# EAGLE board board (EAGLE 9.7.0)
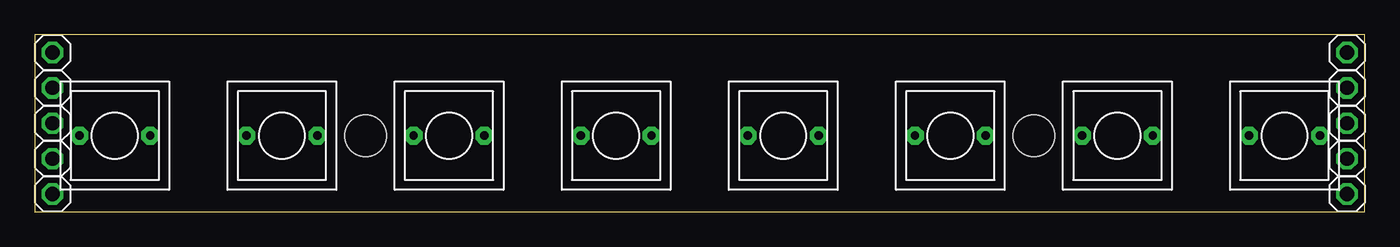
[diagram p0: board, top side]
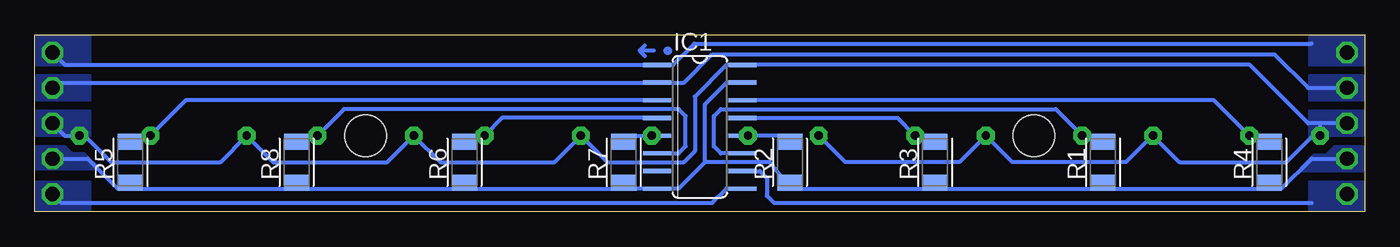
[diagram p1: board, bottom side, seen from below]

Size 95.5 x 12.7 mm. Coordinates in mm from the lower left corner, seen from the top.
Outline: 0,0 95.5,0 95.5,12.7 0,12.7 0,0
Copper layers (1*16): Top 0.035mm / dielectric 1.5mm / Bottom 0.035mm
Design rules "default *": minimum track width 6mil, minimum drill 0.35mm, track to track 13mil, track to pad 13mil, pad to pad 13mil, via to via 13mil, smd to smd 0mil, copper to edge 0mil, drill to drill 0mil, minimum pad ring 10mil, minimum via ring 8mil, stop-mask expansion 4mil, vias tented up to drill 0mil, thermal gap 10mil
Holes 3 mm at 23.75,5.46 71.75,5.46

## Footprints (pad centres in the part's own frame; a part is rotated, then mirrored left to right if it is on the bottom)
SO16 = smd 0.305 x 2.032: 1 -4.445,-3.073; 2 -3.175,-3.073; 3 -1.905,-3.073; 4 -0.635,-3.073; 5 0.635,-3.073; 6 1.905,-3.073; 7 3.175,-3.073; 8 4.445,-3.073; 9 4.445,3.073; 10 3.175,3.073; 11 1.905,3.073; 12 0.635,3.073; 13 -0.635,3.073; 14 -1.905,3.073; 15 -3.175,3.073; 16 -4.445,3.073
1X01 = drill 1.016 octagon: 1 0,0
RESC3216X70 = smd 1.165 x 1.815: 1 -1.475,0; 2 1.475,0
BUTTON = drill 0.6 pad 1.27 octagon: P$1 2.54,0; P$2 -2.54,0

## Placement (x,y rotation side)
IC1  74HC165D  [SO16]  47.75,6.1 270 bottom
JP2  PINHD-1X1  [1X01]  94.23,3.81 0 top
JP3  PINHD-1X1  [1X01]  1.27,11.43 0 top
JP4  PINHD-1X1  [1X01]  1.27,8.89 0 top
JP5  PINHD-1X1  [1X01]  1.27,1.27 0 top
JP6  PINHD-1X1  [1X01]  1.27,6.35 0 top
JP7  PINHD-1X1  [1X01]  1.27,3.81 0 top
JP8  PINHD-1X1  [1X01]  94.23,6.35 0 top
JP9  PINHD-1X1  [1X01]  94.23,1.27 0 top
JP10  PINHD-1X1  [1X01]  94.23,8.89 0 top
JP11  PINHD-1X1  [1X01]  94.23,11.43 0 top
R1  [RESC3216X70]  18.8,3.56 90 bottom
R2  [RESC3216X70]  41.28,3.56 90 bottom
R3  [RESC3216X70]  30.86,3.56 90 bottom
R4  [RESC3216X70]  6.86,3.56 90 bottom
R5  [RESC3216X70]  88.65,3.56 90 bottom
R6  [RESC3216X70]  64.64,3.56 90 bottom
R7  [RESC3216X70]  53.21,3.56 90 bottom
R8  [RESC3216X70]  76.71,3.56 90 bottom
S1  BUTTON  [BUTTON]  17.75,5.46 180 top
S2  BUTTON  [BUTTON]  41.75,5.46 180 top
S3  BUTTON  [BUTTON]  29.75,5.46 180 top
S4  BUTTON  [BUTTON]  5.75,5.46 180 top
S5  BUTTON  [BUTTON]  89.75,5.46 0 top
S6  BUTTON  [BUTTON]  65.75,5.46 0 top
S7  BUTTON  [BUTTON]  53.75,5.46 0 top
S8  BUTTON  [BUTTON]  77.75,5.46 0 top

## Library data of the parts
IC1 S1-S8 = Pravdomil Electronic Library
JP2-JP11 = Pravdomil Electronic Library; CATEGORY: CONNECTOR; SUB-CATEGORY: PIN-HEADER
R1-R8 = Resistor; CATEGORY: Resistor; SUB-CATEGORY: Fixed

## Nets
CLK: IC1.2 JP4.1 JP10.1
GND: IC1.8 IC1.15 JP2.1 JP7.1 R1.1 R2.1 R3.1 R4.1 R5.1 R6.1 R7.1 R8.1
INPUT_1: IC1.11 R1.2 S1.P$2
INPUT_2: IC1.12 R2.2 S2.P$2
INPUT_3: IC1.13 R3.2 S3.P$2
INPUT_4: IC1.14 R4.2 S4.P$2
INPUT_5: IC1.3 R5.2 S5.P$2
INPUT_6: IC1.4 R6.2 S6.P$2
INPUT_7: IC1.5 R7.2 S7.P$2
INPUT_8: IC1.6 R8.2 S8.P$2
LATCH: IC1.1 JP3.1 JP11.1
SER_IN: IC1.10 JP5.1
SER_OUT: IC1.9 JP9.1
VCC: IC1.16 JP6.1 JP8.1 S1.P$1 S2.P$1 S3.P$1 S4.P$1 S5.P$1 S6.P$1 S7.P$1 S8.P$1

## Tracks (layer width: path | path; a pad name or v marks a point on that pad's centre or on a via)
CLK
  Bottom 0.305: JP10.1 93.85,9.27 IC1.2 48.9,9.27 46.86,11.3 6.48,11.3 4.06,8.89 JP4.1
  pour Bottom (no thermals): 0.15,8.03 3.91,8.03 3.91,9.75 0.15,9.75
  pour Bottom (no thermals): 91.59,8.03 95.35,8.03 95.35,9.75 91.59,9.75
GND
  Bottom 0.305: JP7.1 3.82,3.81 6,1.65 6.35,1.65 R4.1 7.49,1.65 18.31,1.65 R1.1 19.3,1.65 30.35,1.65 R3.1 31.39,1.65 40.51,1.65 R2.1 41.57,2.13 42.73,3.56 47.37,3.56 | JP2.1 91.69,3.81 89.53,1.65 89.03,1.65 R5.1 88.27,1.65 77.09,1.65 R8.1 76.33,1.65 65.02,1.65 R6.1 64.13,1.65 53.98,1.65 R7.1 53.09,2.13 52.6,1.65 IC1.8 49.28,1.65 47.37,3.56 | 47.37,3.56 47.37,7.72 45.82,9.27 IC1.15
  pour Bottom (no thermals): 4.55,3.11 3.62,4.04 2.76,4.04 2.71,4.06 2.1,4.67 0.15,4.67 0.15,2.95 4.55,2.95
  pour Bottom (no thermals): 93.41,4.67 92.92,4.19 92.87,4.17 92.01,4.17 90.92,3.07 95.35,3.07 95.35,4.67
INPUT_1
  Bottom 0.305: IC1.11 46.23,4.19 46.74,4.7 46.74,6.86 46.23,7.37 22.19,7.37 S1.P$2 20.09,5.66 R1.2
INPUT_2
  Bottom 0.152: IC1.12 44.3,5.46
  Bottom 0.305: 44.3,5.46 S2.P$2 41.5,5.46 R2.2
INPUT_3
  Bottom 0.305: R3.2 31.01,5.46 S3.P$2 33.56,6.73 IC1.13
INPUT_4
  Bottom 0.305: IC1.14 10.83,8 S4.P$2 7.01,5.46 R4.2
INPUT_5
  Bottom 0.305: IC1.3 84.67,8 S5.P$2 87.36,5.61 R5.2
INPUT_6
  Bottom 0.305: IC1.4 61.94,6.73 S6.P$2 64.49,5.46 R6.2
INPUT_7
  Bottom 0.152: IC1.5 S7.P$2
  Bottom 0.305: R7.2 52.98,5.46 S7.P$2
INPUT_8
  Bottom 0.305: IC1.6 49.28,4.19 48.77,4.7 48.77,6.86 49.28,7.37 73.3,7.37 S8.P$2 75.4,5.66 R8.2
LATCH
  Bottom 0.305: 3.81,12.06 48.13,12.06 49.66,10.54 IC1.1 93.34,10.54 JP11.1
  pour Bottom (no thermals): 0.08,10.49 3.99,10.49 3.99,12.62 0.08,12.62
  pour Bottom (no thermals): 91.59,10.57 95.35,10.57 95.35,12.55 91.59,12.55
N$1
  Bottom 0.305: 51.05,11.56 52.07,11.56 | 51.69,11.94 52.07,11.56 | 52.07,11.56 51.69,11.18
SER_IN
  Bottom 0.305: 3.81,0.64 42.42,0.64 42.93,1.14 42.93,2.41 43.43,2.92 IC1.10
  pour Bottom (no thermals): 0.15,0.15 3.91,0.15 3.91,2.13 0.15,2.13
SER_OUT
  Bottom 0.305: JP9.1 93.6,0.64 46.86,0.64 45.85,1.65 IC1.9
  pour Bottom (no thermals): 91.59,0.15 95.35,0.15 95.35,2.13 91.59,2.13
VCC
  Bottom 0.305: S2.P$1 37.3,3.56 29.11,3.56 S3.P$1 25.3,3.56 17.14,3.56 15.24,5.46 S1.P$1 13.3,3.56 5.62,3.56 3.71,5.46 S4.P$1 3.21,6.35 JP6.1 4.06,6.35 8.26,10.54 IC1.16 45.82,10.54 48.11,8.26 48.11,4.34 48.9,3.56 54.38,3.56 S7.P$1 58.19,3.56 66.38,3.56 S6.P$1 70.19,3.56 78.38,3.56 S8.P$1 80.29,5.44 82.17,3.56 90,3.56 91.91,5.46 S5.P$1 93.34,5.46 JP8.1
  pour Bottom (no thermals): 0.15,5.49 3.91,5.49 3.91,7.21 0.15,7.21
  pour Bottom (no thermals): 91.59,5.49 95.35,5.49 95.35,7.21 91.59,7.21
(copper drawn outside any net)
  shapes: Bottom circle x1